# Altium PCB Power_Meter.PcbDoc
Units mm, origin at the board's own origin, x right, y up, seen from the top; angles counter-clockwise.
Board outline 68.58 x 47.6 mm, 2 copper layers (Top Layer, Bottom Layer); 15 components, 14 nets, 85 pads, 16 vias.
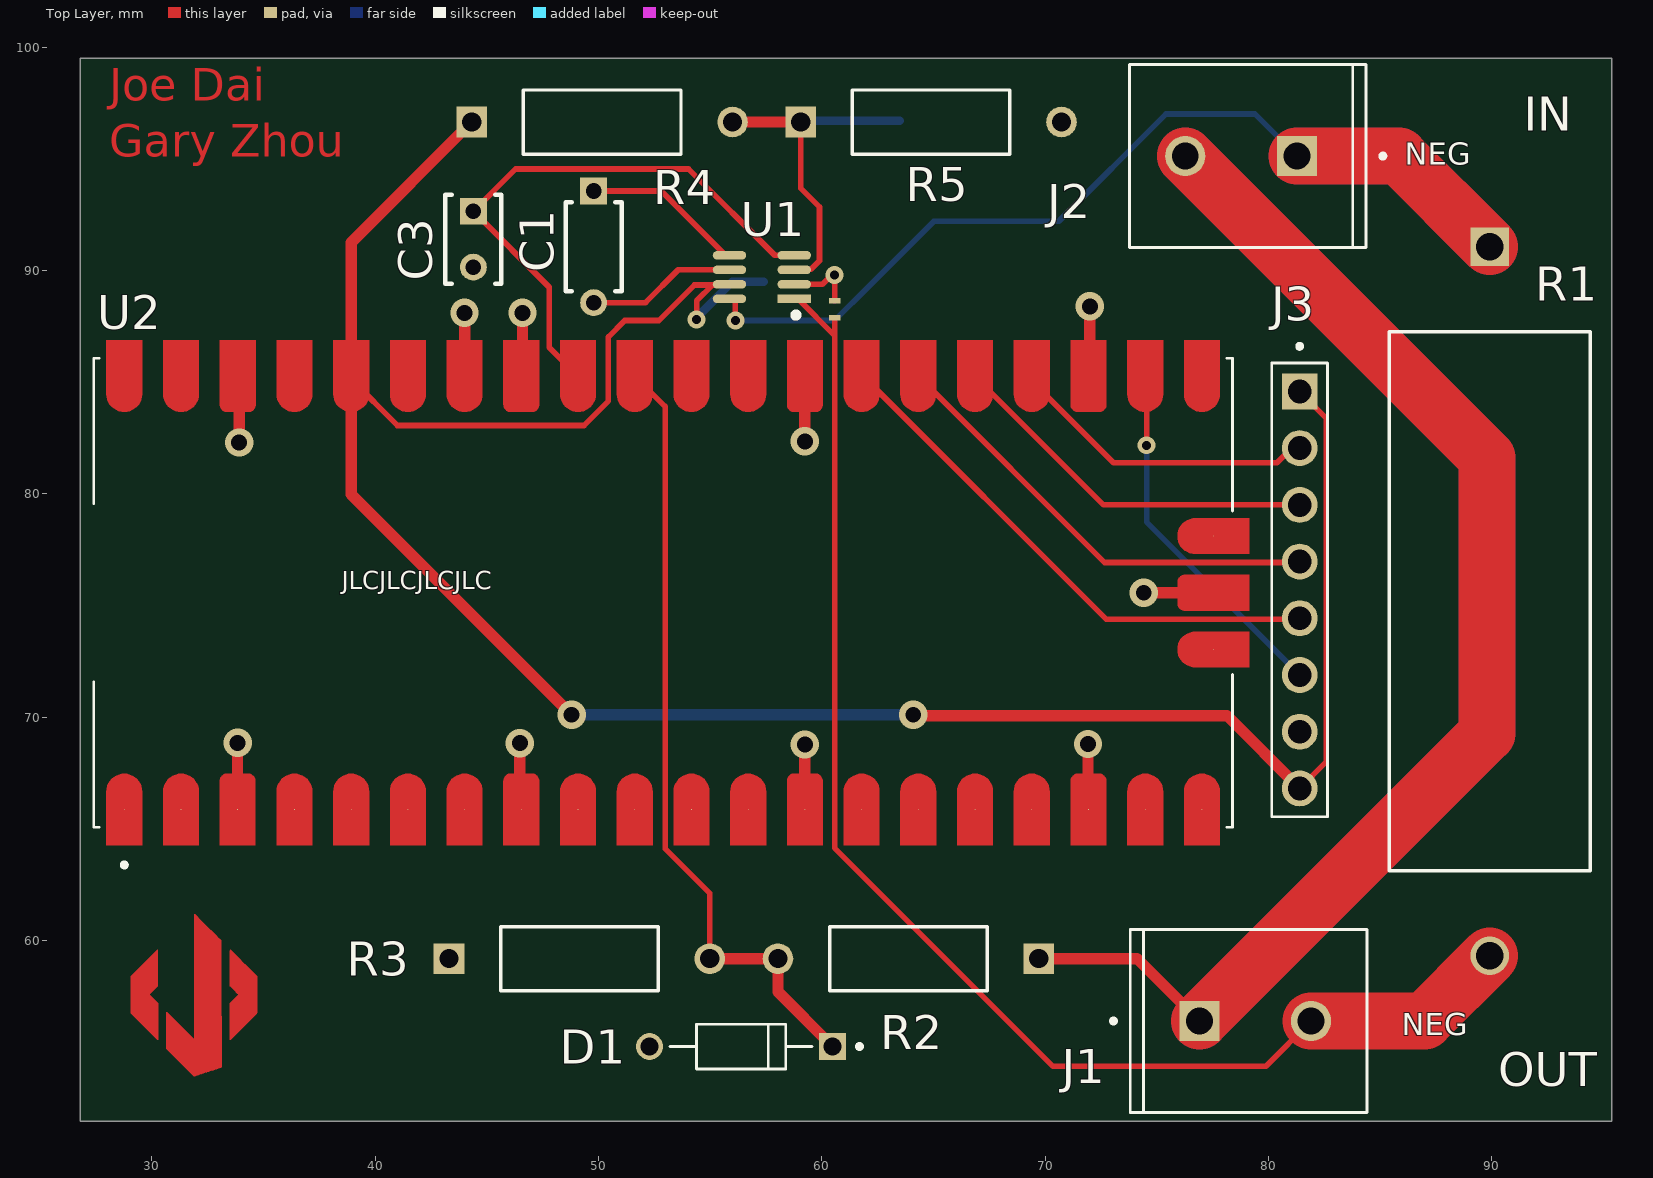
[diagram p0: Top Layer view]
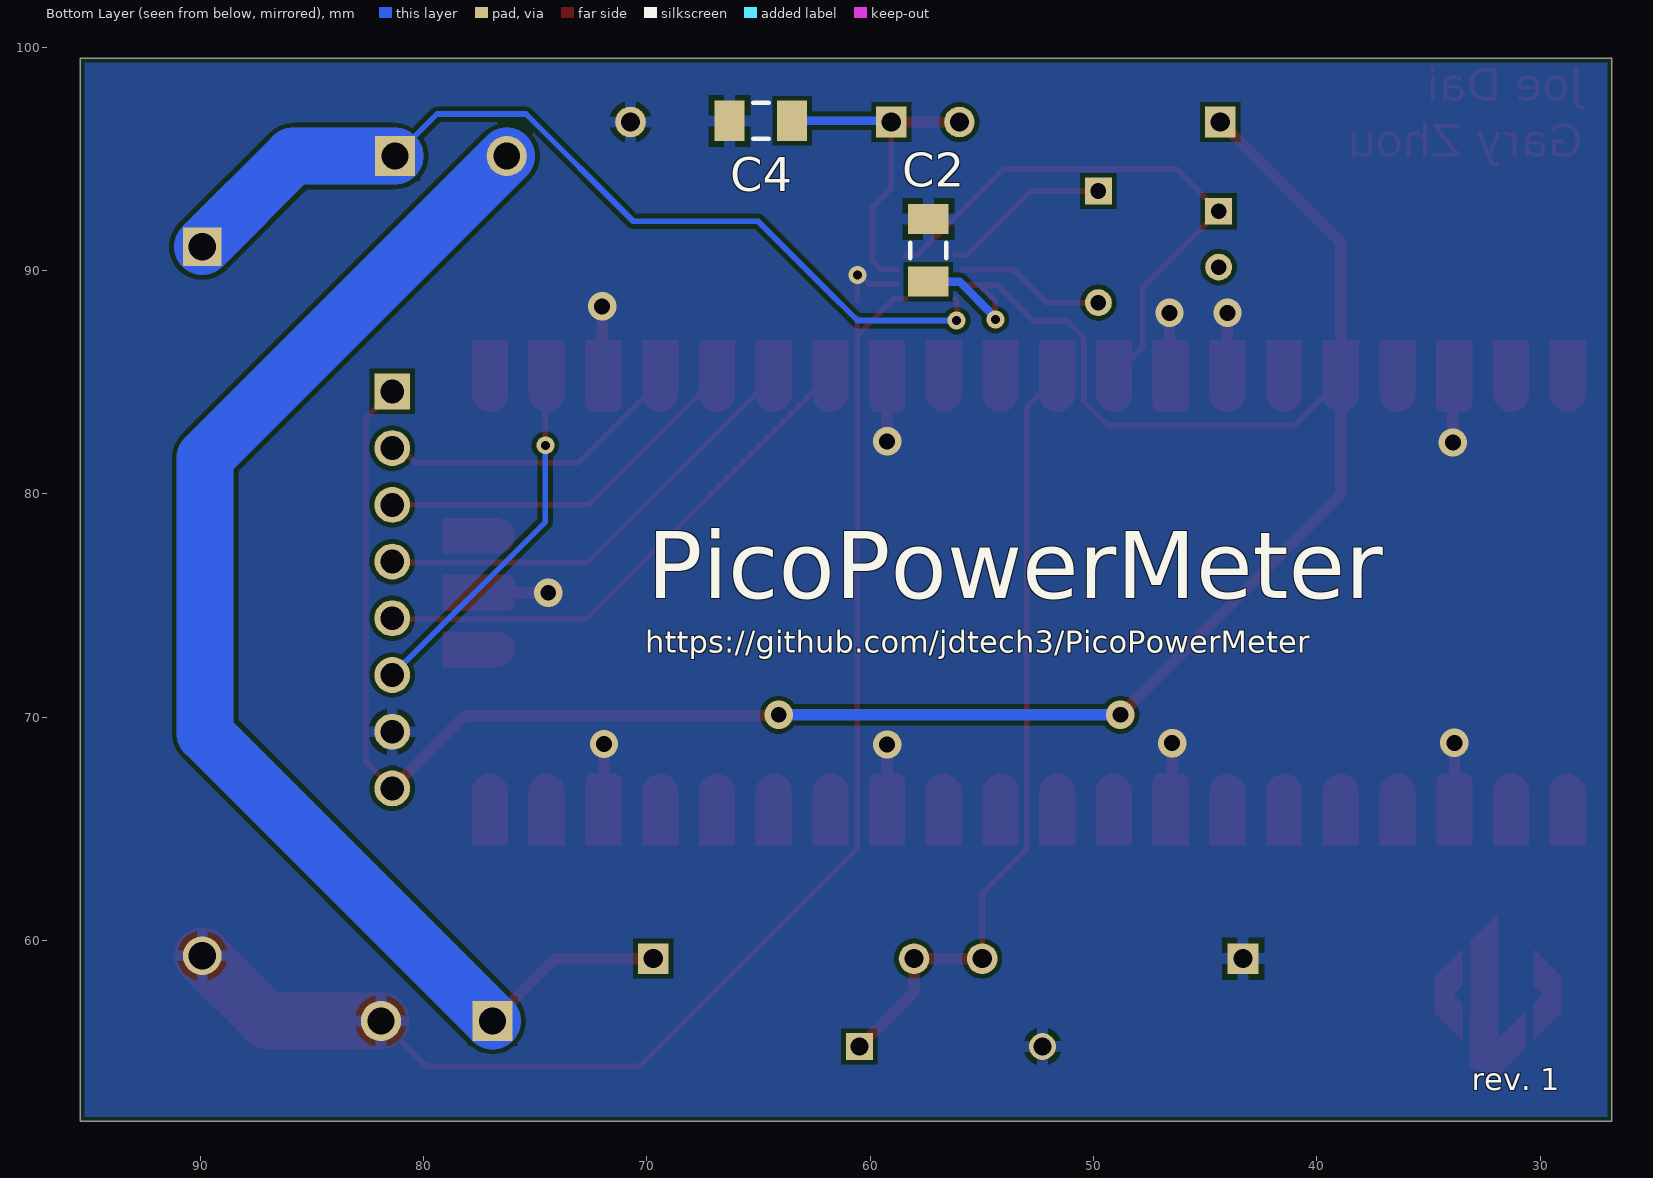
[diagram p1: Bottom Layer view, seen from below]
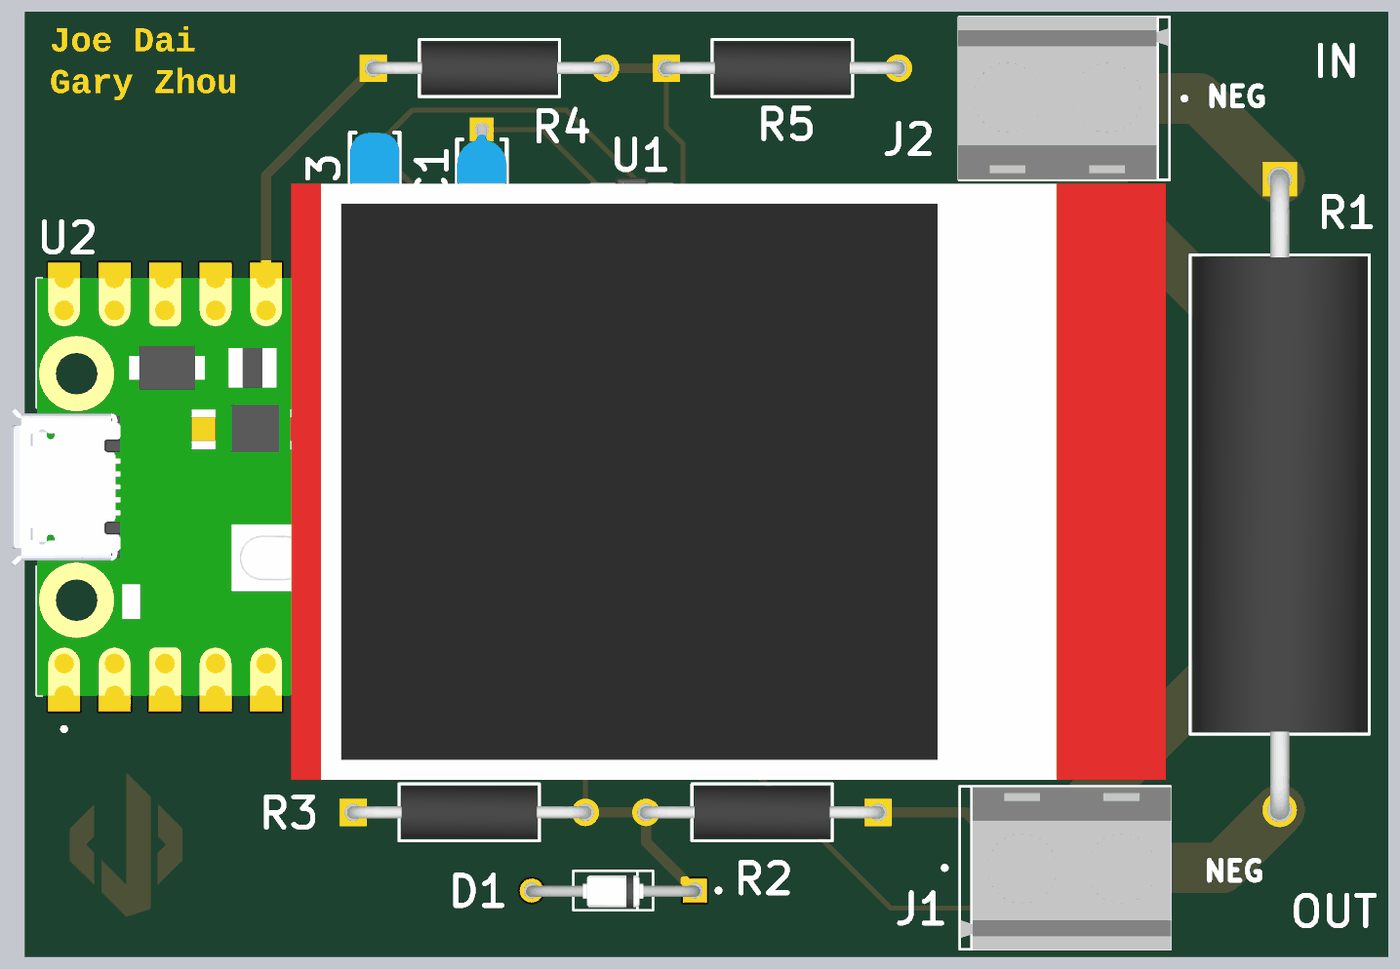
[diagram p2: 3D render of the assembled board from above, using the file's embedded part models]

## Layer stack, top to bottom
Top Solder: solder mask 0.0102, Solder Resist, Dk 3.5
Top Layer: signal copper 0.0356
Dielectric 1: dielectric 0.32, FR-4, Dk 4.8
Bottom Layer: signal copper 0.0356
Bottom Solder: solder mask 0.0102, Solder Resist, Dk 3.5

## Board outline
95.377,99.5 95.377,51.9 26.797,51.9 26.797,99.5

## Design rules (kind name [scope] priority, off if disabled: settings)
BoardOutlineClearance [All] p1: gap=0.2 ignorepadtopadclearanceinfootprint=FALSE except(0.4: Arc-SplitBarrior Arc-SplitContinuation Track-SplitBarrior Track-SplitContinuation SMDPad-SplitBarrior SMDPad-SplitContinuation THPad-SplitBarrior THPad-SplitContinuation Via-SplitBarrior Via-SplitContinuation Fill-SplitBarrior Fill-SplitContinuation Poly-SplitBarrior Poly-SplitContinuation Region-SplitBarrior Region-SplitContinuation Text-SplitBarrior Text-SplitContinuation)
Clearance "Clearance Bottom Layer" [OnLayer('Bottom Layer')] p1: gap=0.203 ignorepadtopadclearanceinfootprint=TRUE except(0.254: Arc-Text Track-Text SMDPad-Text THPad-Text Via-Text Fill-Text Poly-Text Region-Text Text-Text)
Clearance "Clearance Top Layer" [OnLayer('Top Layer')] p2: gap=0.203 ignorepadtopadclearanceinfootprint=TRUE except(0.254: Arc-Text Track-Text SMDPad-Text THPad-Text Via-Text Fill-Text Poly-Text Region-Text Text-Text)
Clearance [All] p3: gap=0.2 ignorepadtopadclearanceinfootprint=FALSE except(0.089: Arc-Arc Arc-Track Arc-SMDPad Track-Track Track-SMDPad SMDPad-SMDPad; 0.127: Arc-Via Track-Via SMDPad-Via THPad-Via Via-Via; 0.254: Arc-Text Track-Text SMDPad-Text THPad-Text Via-Text Fill-Text Poly-Text Region-Text Text-Text)
HoleSize [All] p1: absolutevalues=TRUE maxlimit=6.3 minlimit=0.2 maxpercent=80.000 minpercent=20.000
MinimumAnnularRing [All] p1: minimumring=0.076
MinimumSolderMaskSliver [All] p1: minsoldermaskwidth=0.1
PolygonConnect PolygonConnect_1 [All] p1: thpad.connectstyle=Relief thpad.reliefconductorwidth=0.508 thpad.reliefentries=4 thpad.polygonreliefangle="90 Angle" thpad.airgapwidth=0.254 smdpad.connectstyle=Relief smdpad.reliefconductorwidth=0.508 smdpad.reliefentries=4 smdpad.polygonreliefangle="90 Angle" smdpad.airgapwidth=0.254 via.connectstyle=Direct via.reliefconductorwidth=0.508 via.reliefentries=4 via.polygonreliefangle="90 Angle" via.airgapwidth=0.254
RoutingCorners [All] p1: cornerstyle=Round minsetback=2.54 maxsetback=2.54
RoutingVias [All] p1: holewidth=0.5 width=1 viastyle="Through Hole" minholewidth=0.2 minwidth=0.45 maxholewidth=1 maxwidth=2
SilkToSilkClearance [All] p1: silktosilkclearance=0.1
SilkToSolderMaskClearance [IsPad] p1: minsilkscreentomaskgap=0.1 clearancetoexposedcopper=TRUE
SolderMaskExpansion [All] p1: expansion=0.102 istentingtop=FALSE
Width [All] p1: maxlimit=2.54 minlimit=0.089 preferedwidth=0.381
25 further rules are at their usual default settings.

## Components (designator, comment, footprint, x,y, rotation, side; value= is the part's Value field where it differs from the comment)
C1 "RDE5C1H152J0M1H03A" FP-RDE0M1-MFG 49.784,91.059 r270 top
C2 "GRM319R71H104KA01D" CAPC3216X95X55NL15T25 57.4,90.9 r270 bottom
C3 "RCER72A473K1DBH03A" FP-RCE1A2-MFG 44.4,91.4 r270 top
C4 "GRM319R71H104KA01D" CAPC3216X95X55NL15T25 64.9,96.7 r0 bottom
D1 "NZX3V3A" DIOAD820W60L400D200 56.388,55.245 r180 top
J1 "282836-2" TE_282836-2 79.415,56.388 r0 top
J2 "282836-2" TE_282836-2 78.78,95.123 r180 top
J3 "TFT LCD" AMPHENOL_G800LE300018YEU 81.407,75.692 r270 top
R1 "MR5FT20L0" STA_MR5_STP 89.916,91.059 r270 top
R2 "MFP-25BRD52-100K" YAG_MF25_YAG 69.723,59.182 r180 top
R3 "MFP-25BRD52-15K" YAG_MF25_YAG 43.307,59.182 r0 top
R4 "MFP-25BRD52-100K" YAG_MF25_YAG 44.323,96.647 r0 top
R5 "MFP-25BRD52-33K" YAG_MF25_YAG 59.055,96.647 r0 top
U1 "AD8293G80ARJZ-R7" FP-RJ-8-IPC_B 57.32,89.703 r180 top
U2 "SC0915" MODULE_SC0915 52.897,75.565 r90 top

## Footprints (in the part's own frame and the unit in brackets; to place one, negate y for a bottom-side part, rotate by r counter-clockwise, add the part's x,y. Pads: shape width x height; smd on the part's side, far side on the other; paste and mask are expansions set on the pad)
AMPHENOL_G800LE300018YEU [mm]
  rect 1.605x1.605 hole 1.07: 1(-8.89,0)
  round 1.605 hole 1.07: 2(-6.35,0) 3(-3.81,0) 4(-1.27,0) 5(1.27,0) 6(3.81,0) 7(6.35,0) 8(8.89,0)
  silkscreen extent -11.01,-1.25 10.16,1.25, body extent -15.13,-41.21 14.87,2.79, height 11.62
CAPC3216X95X55NL15T25 [mm] "Chip Capacitor, 2-Leads, Body 3.35x1.75mm, IPC Medium Density"
  rect 1.35x1.8 smd: 1(-1.4,0) 2(1.4,0)
  silkscreen extent -0.35,-0.8 0.35,0.8, body extent -1.68,-0.87 1.68,0.87, height 0.95
DIOAD820W60L400D200 [mm]
  round 1.2 hole 0.8: 1(4.1,0)
  rect 1.2x1.2 hole 0.8: 2(-4.1,0)
  silkscreen extent -5.4,-1 3.18,1, body extent -4.37,-0.76 4.37,0.83, height 1.6
FP-RCE1A2-MFG [mm]
  rect 1.2x1.2 hole 0.7 paste-1000 mask+0: 1(-1.25,0)
  round 1.2 hole 0.7 paste-1000 mask+0: 2(1.25,0)
  silkscreen extent -2,-1.25 2,1.25, body extent -2.1,-1.35 2.1,1.35, height 0.25
FP-RDE0M1-MFG [mm]
  rect 1.2x1.2 hole 0.7 paste-1000 mask+0: 1(-2.5,0)
  round 1.2 hole 0.7 paste-1000 mask+0: 2(2.5,0)
  silkscreen extent -2,-1.25 2,1.25, body extent -3.2,-1.35 3.2,1.35, height 0.25
FP-RJ-8-IPC_B [mm]
  rect 1.5x0.39 smd paste+0 mask+0: 1(-1.45,0.975)
  rrect100% 1.5x0.39 smd paste+0 mask+0: 2(-1.45,0.325) 3(-1.45,-0.325) 4(-1.45,-0.975) 5(1.451,-0.975) 6(1.451,-0.325) 7(1.451,0.325) 8(1.451,0.975)
  silkscreen extent -1.65,1.58 -1.4,1.82, body extent -2.1,-1.7 2.1,1.7, height 0.25
MODULE_SC0915 [mil]
  round 1 smd paste-39.37 mask+3.94: 1(-381.89,950) 2(-381.89,850) 3(-381.89,750.38) 4(-381.89,650) 5(-381.89,550) 6(-381.89,450) 7(-381.89,350) 8(-381.89,250) 9(-381.89,150) 10(-381.89,50) 11(-381.89,-50) 12(-381.89,-150) 13(-381.89,-250) 14(-381.89,-350) 15(-381.89,-450) 16(-381.89,-550) 17(-381.89,-650) 18(-381.89,-750) 19(-381.89,-850) 20(-381.89,-950) 21(381.89,-950) 22(381.89,-850) 23(381.89,-750) 24(381.89,-650) 25(381.89,-550) 26(381.89,-450) 27(381.89,-350) 28(381.89,-250) 29(381.89,-150) 30(381.89,-50) 31(381.89,50) 32(381.89,150) 33(381.89,250) 34(381.89,350) 35(381.89,450) 36(381.89,550) 37(381.89,650) 38(381.89,750) 39(381.89,850) 40(381.89,950) D1(-100,-970) D2(0,-970) D3(100,-970)
  Top Layer region: 68.5,-1032.99 131.5,-1032.99 131.5,-938.5 129.1,-926.45 122.27,-916.23 112.05,-909.41 100,-907.01 100,-907.01 87.95,-909.41 77.73,-916.23 70.9,-926.45 68.5,-938.5 68.5,-938.5
  Top Layer region: -31.5,-1032.99 31.5,-1032.99 31.5,-919.61 30.54,-914.79 27.81,-910.7 23.72,-907.97 18.9,-907.01 18.9,-907.01 -18.9,-907.01 -23.72,-907.97 -27.81,-910.7 -30.54,-914.79 -31.5,-919.61 -31.5,-919.61
  Top Layer region: -131.5,-1032.99 -68.5,-1032.99 -68.5,-938.5 -70.9,-926.45 -77.73,-916.23 -87.95,-909.41 -100,-907.01 -100,-907.01 -112.05,-909.41 -122.27,-916.23 -129.1,-926.45 -131.5,-938.5 -131.5,-938.5
  Top Layer region: -444.88,918.5 -350.39,918.5 -338.34,920.9 -328.12,927.73 -321.3,937.95 -318.9,950 -318.9,950 -321.3,962.05 -328.12,972.27 -338.34,979.1 -350.39,981.5 -350.39,981.5 -444.88,981.5
  Top Layer region: 318.9,-768.9 319.86,-773.72 322.59,-777.81 326.67,-780.54 331.5,-781.5 331.5,-781.5 444.88,-781.5 444.88,-718.5 331.5,-718.5 326.67,-719.46 322.59,-722.19 319.86,-726.28 318.9,-731.1 318.9,-731.1
  Top Layer region: 318.9,-268.9 319.86,-273.72 322.59,-277.81 326.67,-280.54 331.5,-281.5 331.5,-281.5 444.88,-281.5 444.88,-218.5 331.5,-218.5 326.67,-219.46 322.59,-222.19 319.86,-226.28 318.9,-231.1 318.9,-231.1
  Top Layer region: 318.9,231.1 319.86,226.28 322.59,222.19 326.67,219.46 331.5,218.5 331.5,218.5 444.88,218.5 444.88,281.5 331.5,281.5 326.67,280.54 322.59,277.81 319.86,273.72 318.9,268.9 318.9,268.9
  Top Layer region: 318.9,-950 321.3,-962.05 328.12,-972.27 338.34,-979.1 350.39,-981.5 350.39,-981.5 444.88,-981.5 444.88,-918.5 350.39,-918.5 338.34,-920.9 328.12,-927.73 321.3,-937.95 318.9,-950
  Top Layer region: 318.9,-850 321.3,-862.05 328.12,-872.27 338.34,-879.1 350.39,-881.5 350.39,-881.5 444.88,-881.5 444.88,-818.5 350.39,-818.5 338.34,-820.9 328.12,-827.73 321.3,-837.95 318.9,-850
  Top Layer region: 318.9,-650 321.3,-662.05 328.12,-672.27 338.34,-679.1 350.39,-681.5 350.39,-681.5 444.88,-681.5 444.88,-618.5 350.39,-618.5 338.34,-620.9 328.12,-627.73 321.3,-637.95 318.9,-650
  Top Layer region: 318.9,-550 321.3,-562.05 328.12,-572.27 338.34,-579.1 350.39,-581.5 350.39,-581.5 444.88,-581.5 444.88,-518.5 350.39,-518.5 338.34,-520.9 328.12,-527.73 321.3,-537.95 318.9,-550
  Top Layer region: 318.9,-450 321.3,-462.05 328.12,-472.27 338.34,-479.1 350.39,-481.5 350.39,-481.5 444.88,-481.5 444.88,-418.5 350.39,-418.5 338.34,-420.9 328.12,-427.73 321.3,-437.95 318.9,-450
  Top Layer region: 318.9,-350 321.3,-362.05 328.12,-372.27 338.34,-379.1 350.39,-381.5 350.39,-381.5 444.88,-381.5 444.88,-318.5 350.39,-318.5 338.34,-320.9 328.12,-327.73 321.3,-337.95 318.9,-350
  Top Layer region: 318.9,-150 321.3,-162.05 328.12,-172.27 338.34,-179.1 350.39,-181.5 350.39,-181.5 444.88,-181.5 444.88,-118.5 350.39,-118.5 338.34,-120.9 328.12,-127.73 321.3,-137.95 318.9,-150
  Top Layer region: 318.9,-50 321.3,-62.05 328.12,-72.27 338.34,-79.1 350.39,-81.5 350.39,-81.5 444.88,-81.5 444.88,-18.5 350.39,-18.5 338.34,-20.9 328.12,-27.73 321.3,-37.95 318.9,-50
  Top Layer region: 318.9,50 321.3,37.95 328.12,27.73 338.34,20.9 350.39,18.5 350.39,18.5 444.88,18.5 444.88,81.5 350.39,81.5 338.34,79.1 328.12,72.27 321.3,62.05 318.9,50
  Top Layer region: 318.9,150 321.3,137.95 328.12,127.73 338.34,120.9 350.39,118.5 350.39,118.5 444.88,118.5 444.88,181.5 350.39,181.5 338.34,179.1 328.12,172.27 321.3,162.05 318.9,150
  Top Layer region: 350.39,318.5 338.34,320.9 328.12,327.73 321.3,337.95 318.9,350 318.9,350 321.3,362.05 328.12,372.27 338.34,379.1 350.39,381.5 350.39,381.5 444.88,381.5 444.88,318.5
  Top Layer region: 350.39,418.5 338.34,420.9 328.12,427.73 321.3,437.95 318.9,450 318.9,450 321.3,462.05 328.12,472.27 338.34,479.1 350.39,481.5 350.39,481.5 444.88,481.5 444.88,418.5
  Top Layer region: 350.39,518.5 338.34,520.9 328.12,527.73 321.3,537.95 318.9,550 318.9,550 321.3,562.05 328.12,572.27 338.34,579.1 350.39,581.5 350.39,581.5 444.88,581.5 444.88,518.5
  Top Layer region: 350.39,618.5 338.34,620.9 328.12,627.73 321.3,637.95 318.9,650 318.9,650 321.3,662.05 328.12,672.27 338.34,679.1 350.39,681.5 350.39,681.5 444.88,681.5 444.88,618.5
  Top Layer region: 350.39,818.5 338.34,820.9 328.12,827.73 321.3,837.95 318.9,850 318.9,850 321.3,862.05 328.12,872.27 338.34,879.1 350.39,881.5 350.39,881.5 444.88,881.5 444.88,818.5
  Top Layer region: -444.88,-781.5 -331.5,-781.5 -326.67,-780.54 -322.59,-777.81 -319.86,-773.72 -318.9,-768.9 -318.9,-768.9 -318.9,-731.1 -319.86,-726.28 -322.59,-722.19 -326.67,-719.46 -331.5,-718.5 -331.5,-718.5 -444.88,-718.5
  Top Layer region: -444.88,-281.5 -331.5,-281.5 -326.67,-280.54 -322.59,-277.81 -319.86,-273.72 -318.9,-268.9 -318.9,-268.9 -318.9,-231.1 -319.86,-226.28 -322.59,-222.19 -326.67,-219.46 -331.5,-218.5 -331.5,-218.5 -444.88,-218.5
  Top Layer region: -444.88,218.5 -331.5,218.5 -326.67,219.46 -322.59,222.19 -319.86,226.28 -318.9,231.1 -318.9,231.1 -318.9,268.9 -319.86,273.72 -322.59,277.81 -326.67,280.54 -331.5,281.5 -331.5,281.5 -444.88,281.5
  Top Layer region: -444.88,718.88 -331.5,718.88 -326.67,719.84 -322.59,722.57 -319.86,726.66 -318.9,731.48 -318.9,731.48 -318.9,769.28 -319.86,774.1 -322.59,778.18 -326.67,780.91 -331.5,781.87 -331.5,781.87 -444.88,781.87
  Top Layer region: -444.88,-981.5 -350.39,-981.5 -338.34,-979.1 -328.12,-972.27 -321.3,-962.05 -318.9,-950 -318.9,-950 -321.3,-937.95 -328.12,-927.73 -338.34,-920.9 -350.39,-918.5 -350.39,-918.5 -444.88,-918.5
  Top Layer region: -444.88,-881.5 -350.39,-881.5 -338.34,-879.1 -328.12,-872.27 -321.3,-862.05 -318.9,-850 -318.9,-850 -321.3,-837.95 -328.12,-827.73 -338.34,-820.9 -350.39,-818.5 -350.39,-818.5 -444.88,-818.5
  Top Layer region: -444.88,-681.5 -350.39,-681.5 -338.34,-679.1 -328.12,-672.27 -321.3,-662.05 -318.9,-650 -318.9,-650 -321.3,-637.95 -328.12,-627.73 -338.34,-620.9 -350.39,-618.5 -350.39,-618.5 -444.88,-618.5
  Top Layer region: -444.88,-581.5 -350.39,-581.5 -338.34,-579.1 -328.12,-572.27 -321.3,-562.05 -318.9,-550 -318.9,-550 -321.3,-537.95 -328.12,-527.73 -338.34,-520.9 -350.39,-518.5 -350.39,-518.5 -444.88,-518.5
  Top Layer region: -444.88,-481.5 -350.39,-481.5 -338.34,-479.1 -328.12,-472.27 -321.3,-462.05 -318.9,-450 -318.9,-450 -321.3,-437.95 -328.12,-427.73 -338.34,-420.9 -350.39,-418.5 -350.39,-418.5 -444.88,-418.5
  Top Layer region: -444.88,-381.5 -350.39,-381.5 -338.34,-379.1 -328.12,-372.27 -321.3,-362.05 -318.9,-350 -318.9,-350 -321.3,-337.95 -328.12,-327.73 -338.34,-320.9 -350.39,-318.5 -350.39,-318.5 -444.88,-318.5
  Top Layer region: -444.88,-181.5 -350.39,-181.5 -338.34,-179.1 -328.12,-172.27 -321.3,-162.05 -318.9,-150 -318.9,-150 -321.3,-137.95 -328.12,-127.73 -338.34,-120.9 -350.39,-118.5 -350.39,-118.5 -444.88,-118.5
  Top Layer region: -444.88,-81.5 -350.39,-81.5 -338.34,-79.1 -328.12,-72.27 -321.3,-62.05 -318.9,-50 -318.9,-50 -321.3,-37.95 -328.12,-27.73 -338.34,-20.9 -350.39,-18.5 -350.39,-18.5 -444.88,-18.5
  Top Layer region: -444.88,18.5 -350.39,18.5 -338.34,20.9 -328.12,27.73 -321.3,37.95 -318.9,50 -318.9,50 -321.3,62.05 -328.12,72.27 -338.34,79.1 -350.39,81.5 -350.39,81.5 -444.88,81.5
  Top Layer region: -444.88,118.5 -350.39,118.5 -338.34,120.9 -328.12,127.73 -321.3,137.95 -318.9,150 -318.9,150 -321.3,162.05 -328.12,172.27 -338.34,179.1 -350.39,181.5 -350.39,181.5 -444.88,181.5
  Top Layer region: -444.88,318.5 -350.39,318.5 -338.34,320.9 -328.12,327.73 -321.3,337.95 -318.9,350 -318.9,350 -321.3,362.05 -328.12,372.27 -338.34,379.1 -350.39,381.5 -350.39,381.5 -444.88,381.5
  Top Layer region: -444.88,418.5 -350.39,418.5 -338.34,420.9 -328.12,427.73 -321.3,437.95 -318.9,450 -318.9,450 -321.3,462.05 -328.12,472.27 -338.34,479.1 -350.39,481.5 -350.39,481.5 -444.88,481.5
  Top Layer region: -444.88,518.5 -350.39,518.5 -338.34,520.9 -328.12,527.73 -321.3,537.95 -318.9,550 -318.9,550 -321.3,562.05 -328.12,572.27 -338.34,579.1 -350.39,581.5 -350.39,581.5 -444.88,581.5
  Top Layer region: -444.88,618.5 -350.39,618.5 -338.34,620.9 -328.12,627.73 -321.3,637.95 -318.9,650 -318.9,650 -321.3,662.05 -328.12,672.27 -338.34,679.1 -350.39,681.5 -350.39,681.5 -444.88,681.5
  Top Layer region: -444.88,818.5 -350.39,818.5 -338.34,820.9 -328.12,827.73 -321.3,837.95 -318.9,850 -318.9,850 -321.3,862.05 -328.12,872.27 -338.34,879.1 -350.39,881.5 -350.39,881.5 -444.88,881.5
  Top Layer region: 331.5,718.5 326.67,719.46 322.59,722.19 319.86,726.28 318.9,731.1 318.9,731.1 318.9,768.9 319.86,773.72 322.59,777.81 326.67,780.54 331.5,781.5 331.5,781.5 444.88,781.5 444.88,718.5
  Top Layer region: 350.39,918.5 338.34,920.9 328.12,927.73 321.3,937.95 318.9,950 318.9,950 321.3,962.05 328.12,972.27 338.34,979.1 350.39,981.5 350.39,981.5 444.88,981.5 444.88,918.5
  silkscreen extent -484,-1004 413,1004, body extent -413,-1004 413,1055, height 147
STA_MR5_STP [mil]
  rect 68x68 hole 48 mask+0: 1(0,0)
  round 68 hole 48 mask+0: 2(1250,0)
  silkscreen extent 150,-177 1100,178, body extent -19,-172 1269,172, height 344
TE_282836-2 [mm]
  rect 1.8x1.8 hole 1.2: 1(-2.5,0)
  round 1.8 hole 1.2: 2(2.5,0)
  silkscreen extent -6.45,-4.1 5,4.1, body extent -5.55,-4.14 5.05,4.06, height 11.35
YAG_MF25_YAG [mil]
  rect 54x54 hole 34 mask+0: 1(0,0)
  round 54 hole 34 mask+0: 2(460,0)
  silkscreen extent 91,-56 369,57, body extent -12,-51 472,51, height 103

## Part data
C1: library part CMP-06035-053070-1, "Ceramic Capacitor 1.5nF ±5% 50V C0G Radial", Capacitance=1.5nF, Case/Package=Radial, Dielectric=C0G, Max Operating Temperature=125°C, Min Operating Temperature=-55°C, Package Quantity=2000, Resistor Type=Ceramic, Tolerance=5%, Voltage Rating=50V, Height=3.5mm, Height - Seated (Max)=0.236inch, Lead Diameter=0.5mm, Lead Pitch=0.197inch, Lead/Base Style="Formed Leads", Length=0.157inch, Mount="Through Hole", Packaging="Tape and Reel", Termination=Radial, Voltage Rating (DC)=50V, Width=3.5mm
C2 C4: library part CMP-1662-00007-4, "Chip Capacitor, 0.1 uF, +/- 10%, 50 V, -55 to 125 degC, 1206 (3216 Metric), RoHS, Tape and Reel", Capacitance="0.1 uF", Manufacturer=Murata, Max Operating Temperature="125 degC", Min Operating Temperature="-55 degC", Package Quantity=4000, Voltage Rating="50 V", ComponentLink1Description="Manufacturer URL", ComponentLink1URL=http://www.murata.com/, ComponentLink2Description=Datasheet, ComponentLink2URL=http://search.murata.co.jp/Ceramy/image/img/A01X/G101/ENG/GRM319R71H104KA01-01.pdf, DatasheetVersion=03/2016, Height="0.85 mm", Lead Pitch="4 mm", Length="3.2 mm", Mount="Surface Mount", Mounting Technology="Surface Mount", PackageDescription="2-Pin Surface Mount Device, Body 3.2 x 1.6 mm", PackageReference="1206 (3216 Metric)", Packaging="Tape and Reel", Pins=2, REACH SVHC="No SVHC", RoHSCompliant=true
C3: library part CMP-06035-043805-1, "Cap Ceramic 47nF 100V X7R ±10% Radial 2.5mm +125°C Automotive Ammo Pack", Capacitance=47nF, Case/Package=Radial, Dielectric=X7R, Max Operating Temperature=125°C, Min Operating Temperature=-55°C, Package Quantity=2000, Ratings=AEC-Q200, Resistor Type=Ceramic, Tolerance=10%, Voltage Rating=100V, Height=3.5mm, Height - Seated (Max)=0.138inch, Lead Diameter=0.5mm, Lead Pitch=0.098inch, Lead/Base Style=Straight, Length=0.157inch, Mount="Through Hole", Packaging="Tape and Reel", Termination=Radial, Voltage Rating (DC)=100V, Width=0.098inch
D1: library part "D Zener", "Zener Diode", LatestRevisionDate=17-Jul-2002, LatestRevisionNote="Re-released for DXP Platform.", PackageDescription="Diode, Thru-Hole; 2 Leads; 0.7 in Pin Spacing", PackageReference=DIODE-0.7, Published=8-Jun-2000, Publisher="Altium Limited"
J1 J2: "Connector, Terminal Block; Wire Receptacle; 2 Pos.; 16-30 AWG; 0.197 in. CL; Sid", Color=Green, Current=13.5A, Flammability Rating="UL94 V-0", Manufacturer="TE Connectivity", Max Supply Voltage (AC)=300V, Package=None, Package Quantity=300, Approvals=UL, Availability=Unavailable, Category="Terminal Blocks", Closed End="No (Without)", ComponentLink1Description=https://datasheet.ciiva.com/11757/0900766b8002dc8a-11757385.pdf?src-supplier=RSComponents, ComponentLink1URL=https://datasheet.ciiva.com/11757/0900766b8002dc8a-11757385.pdf?src-supplier=RSComponents, ComponentLink2Description=https://datasheet.ciiva.com/16393/282836-2-16393382.pdf?src-supplier=Future+Electronics, ComponentLink2URL=https://datasheet.ciiva.com/16393/282836-2-16393382.pdf?src-supplier=Future+Electronics, ComponentLink3Description=https://datasheet.ciiva.com/15169/getdatasheetpartid-155855-15169553.pdf?src-supplier=Verical, ComponentLink3URL=https://datasheet.ciiva.com/15169/getdatasheetpartid-155855-15169553.pdf?src-supplier=Verical, ComponentLink4Description=https://datasheet.ciiva.com/7628/1731782-7628513.pdf?src-supplier=Element14, ComponentLink4URL=https://datasheet.ciiva.com/7628/1731782-7628513.pdf?src-supplier=Element14, ComponentLink5Description=https://datasheet.ciiva.com/3141/eng-cs-1308389-eurostyle-terminal-blocks-0607-3141118.pdf?src-supplier=Avnet, ComponentLink5URL=https://datasheet.ciiva.com/3141/eng-cs-1308389-eurostyle-terminal-blocks-0607-3141118.pdf?src-supplier=Avnet, ComponentLink6Description=https://datasheet.ciiva.com/30261/eng-cs-1308389-eurostyle-terminal-blocks-0607-30261813.pdf?src-supplier=Onlinecomponents.com, ComponentLink6URL=https://datasheet.ciiva.com/30261/eng-cs-1308389-eurostyle-terminal-blocks-0607-30261813.pdf?src-supplier=Onlinecomponents.com, ComponentLink7Description=https://datasheet.ciiva.com/823/eng-cd-282836-h10-823437.pdf?src-supplier=Digi-Key, ComponentLink7URL=https://datasheet.ciiva.com/823/eng-cd-282836-h10-823437.pdf?src-supplier=Digi-Key, Connector Type=Receptacle, Contact Material=Brass, Contact Plating=Tin, Current Rating=13.5A, Depth=8.2mm, ELV=Compliant, Housing Color=Green, Housing Material=Polyamide, Insulation Material=Nylon, Interlock="Yes (With)", Lead Free="Lead Free", Length=10.6mm, Manufacturer Part Number=282836-2, Max Current Rating=13.5A, Max Voltage Rating (AC)=300V, MF="{'manufacturer': u'TE Connectivity'}", Mounting Technology="Through Hole", MP=282836-2, Number of Circuits=2, Number of Contacts=2, Number of Levels=1, Number of Poles=2, Number of Positions=2, Number of Positions Per Level=2, Number of Rows=1, Orientation=Straight, Packaging=Tray, Pitch=5mm, Plating=Brass, Price=None, Pricing 1="1=1.05000, 10=0.65800, 25=0.56320, 50=0.50620, 100=0.49560, 250=0.42180, 500=0.40070, 1000=0.35853, 5000=0.28049 (USD)", Radiation Hardening=No, RoHS=Yes, RoHS Compliant=Yes, Screw Flange="No (Without)", Screwless Terminal Block="No (Without)", Series=Buchanan, Side Stackable="Yes (With)", Stock 1=3928, Supplier 1=Digi-Key, Tail Length=3.5mm, Termination=Solder, Thread Size=M3, Voltage=300V, Voltage Rating=300V, Width=10mm, Wire Gauge (Max)=30AWG, Wire Gauge (Min)=30AWG, Wire/Cable Gauge=30AWG
J3: library part G800LE300018YEU, Package=None, Availability=Unavailable, MF="{'manufacturer': u'Amphenol ICC (Commercial Products)'}", MP=G800LE300018YEU, Price=None
R1: "No Description Available", Mfr_Name="Stackpole International", Copyright="Copyright (C) 2022 Ultra Librarian. All rights reserved.", Digi-Key_Part_Number_1=MR5FT20L0CT-ND, Digi-Key_Part_Number_2=MR5FT20L0TR-ND, Manufacturer_Part_Number=MR5FT20L0, RefDes=RefDes, Type=DEV
R2 R3 R4 R5: "No Description Available", Mfr_Name=Yageo, Copyright="Copyright (C) 2022 Ultra Librarian. All rights reserved.", RefDes=RefDes, Type=DEV
  R2 R4: Digi-Key_Part_Number_1=100KADCT-ND, Digi-Key_Part_Number_2=100KADTR-ND, Manufacturer_Part_Number=MFP-25BRD52-100K
  R3: Digi-Key_Part_Number_1=15KADCT-ND, Digi-Key_Part_Number_2=15KADTR-ND, Manufacturer_Part_Number=MFP-25BRD52-15K
  R5: Digi-Key_Part_Number_1=33KADCT-ND, Digi-Key_Part_Number_2=33KADTR-ND, Manufacturer_Part_Number=MFP-25BRD52-33K
U1: library part CMP-09116-000180-1, "IC INST AMP 1 CIRCUIT SOT23-8", Case/Package=SOT, Input Bias Current=2nA, Input Offset Voltage (Vos)=50uV, Input Resistance=10GR, Max Operating Temperature=85°C, Max Supply Voltage=5.5V, Min Operating Temperature=-40°C, Min Supply Voltage=1.8V, Operating Supply Current=1.3mA, Output Current per Channel=35mA, Package Quantity=1, Power Supply Rejection Ratio (PSRR)=94dB, -3db Bandwidth=500Hz, Amplifier Type="INSTRUMENTATION AMPLIFIER", Common Mode Rejection Ratio=140dB, Contact Plating=Gold, Gain Bandwidth Product=500Hz, Lead Free="Contains Lead", Mount="Surface Mount", Number of Amplifiers=1, Number of Channels=1, Number of Circuits=1, Number of Elements=1, Number of Pins=8, Packaging="Tape and Reel", Radiation Hardening=No, REACH SVHC="No SVHC", RoHS Compliant=Yes, Series=-
U2: "Raspberry Pi Pico Embedded Dev Module", Manufacturer="Raspberry Pi", Package=None, Availability=Unavailable, Category="Embedded Processors and Controllers", Manufacturer Part Number=SC0915, MF="{'manufacturer': u'Raspberry Pi'}", MP=SC0915, Price=None, Pricing 1="1=4.00000 (USD)", RoHS=No, Stock 1=26880, Supplier 1=Digi-Key

## Free pads (board coordinates)
  rect 0.508x0.254 smd: 2(60.579,87.884) 2(60.579,88.646)

## Via types
v1: diameter 1.27, hole 0.711, Top Layer to Bottom Layer, 12 vias
v2: diameter 0.8, hole 0.4, Top Layer to Bottom Layer, 4 vias

## Nets (pads, with @x,y where several pads share a name; then routed paths per layer and width w, separated by ;. In a path a pad name is that pad's centre, name@x,y a point inside that pad or via, vN(x,y) a via of type N, cw(c..) or ccw(c..) an arc to the next point about the centre after c; other vN are vias at no path point)
AMP_FILT: C1.2 U1.6 | length 6.7
  Top Layer w0.254: C1.2 52.105,88.559 53.574,90.028 U1.6
GND: C2.1 C4.2 D1.1 J1.2 J3.7 pad.2 R1.2 R3.1 R5.2 U1.1 U1.2 U2.3 U2.8 U2.13 U2.18 U2.23 U2.28 U2.33 U2.34 U2.38 U2.D2 | length 94.8
  Top Layer w0.254: U2.38@33.847,85.255 33.909,85.193 ; v1(44,88.1) v1@44.007,88.093 ; 46.482,65.94 U2.8@46.547,65.875 ; U1.1@58.42,88.728 58.945,88.728 60.579,87.094 ; U1.2 60.02,89.378 60.431,89.789 v2(60.579,89.789) pad.2@60.579,88.646 ; pad.2@60.579,87.884 60.579,87.094 ; U2.23@71.947,85.255 71.947,85.385 72.009,85.447 ; J1.2 79.883,54.356 70.357,54.356 60.579,64.134 60.579,87.094
  Top Layer w0.381: U2.33 46.6,85.318
  Top Layer w0.508: U2.3 33.837,68.836 v1(33.844,68.842) ; v1(33.909,82.296) 33.909,85.193 ; U2.34 v1@44.007,88.093 ; 46.482,65.94 v1(46.482,68.834) ; 46.6,85.318 v1(46.6,88.1) ; U2.13@59.247,65.875 v1(59.247,68.772) ; v1(59.247,82.347) U2.28@59.247,85.255 ; 71.925,65.887 v1(71.925,68.794) ; 72.009,85.447 v1(72.009,88.392) ; v1(74.422,75.565) 77.597,75.565
  Top Layer w2.54: J1.2 86.995,56.388 R1.2
LCD_LED: C2.2 J3.1 J3.8 R4.1 U1.7 U2.36 | length 113.3
  Top Layer w0.254: 38.927,85.125 40.994,83.058 49.35,83.058 50.446,84.154 50.446,87.023 51.18,87.757 52.705,87.757 54.298,89.35 55.104,89.35 ; v2(54.4,87.8) 54.4,88.647 55.104,89.35 ; U1.7@55.841,89.35 55.104,89.35 ; J3.8 82.591,67.986 82.591,83.398 J3.1
  Top Layer w0.381: 38.927,85.125 U2.36@38.927,85.255 ; v1(64.1,70.1) v1@64.136,70.064
  Top Layer w0.508: 38.927,85.125 38.927,79.973 v1(48.8,70.1) ; U2.36 38.927,91.251 R4.1 ; v1@64.136,70.064 78.145,70.064 J3.8
  Bottom Layer w0.381: v2(54.4,87.8) 54.4,87.9 56,89.5 C2.2
  Bottom Layer w0.508: v1(48.8,70.1) v1(64.1,70.1)
LCD_RESET: J3.5 U2.27 | length 24.1
  Top Layer w0.254: U2.27 61.857,85.265 72.738,74.384 81.369,74.384 J3.5
LCD_TFT_A0: J3.4 U2.26 | length 20.6
  Top Layer w0.254: U2.26 72.668,76.924 81.369,76.924 J3.4
LCD_TFT_CS: J3.6 U2.22 | length 16.2
  Top Layer w0.254: U2.22 74.549,85.203 v2(74.549,82.169)
  Bottom Layer w0.254: v2(74.549,82.169) 74.549,78.74 J3.6
LCD_TFT_SCK: J3.2 U2.24 | length 14
  Top Layer w0.254: U2.24 69.407,85.054 73.073,81.388 80.387,81.388 81.041,82.042 J3.2
LCD_TFT_SDA: J3.3 U2.25 | length 16.9
  Top Layer w0.254: U2.25@66.867,85.255 72.62,79.502 J3.3
NetC1_1: C1.1 U1.5 | length 7.6
  Top Layer w0.254: C1.1 52.813,93.559 55.694,90.678 U1.5@56.219,90.678
NetC4_1: C4.1 R4.2 R5.1 U1.3 | length 15.4
  Top Layer w0.254: U1.3 58.798,90.056 59.522,90.056 59.904,90.437 59.904,92.838 59.055,93.687 R5.1
  Top Layer w0.508: R4.2 R5.1
  Bottom Layer w0.381: R5.1 59.108,96.7 C4.1
NetJ2_1: J2.1 R1.1 U1.8 | length 51.4
  Top Layer w0.254: v2(56.134,87.757) 56.134,88.665 56.197,88.728 U1.8@56.219,88.728
  Top Layer w2.54: J2.1 85.852,95.123 R1.1
  Bottom Layer w0.254: v2(56.134,87.757) 60.579,87.757 62.103,89.281 65.024,92.202 70.612,92.202 75.414,97.004 79.399,97.004 J2.1
  Bottom Layer w2.54: J2.1 85.852,95.123 R1.1
V+: J1.1 J2.2 R2.1 | length 107.7
  Top Layer w0.508: R2.1 74.121,59.182 J1.1
  Top Layer w2.54: J2.2 89.789,81.614 89.789,69.262 J1.1
  Bottom Layer w2.54: J2.2 89.789,81.614 89.789,69.262 J1.1
V_DIV: D1.2 R2.2 R3.2 U2.31 | length 35.5
  Top Layer w0.254: U2.31 52.986,83.906 52.986,64.107 54.991,62.102 R3.2
  Top Layer w0.508: R3.2 R2.2 58.039,57.694 D1.2
VDROP_AMP: C3.1 U1.4 U2.32 | length 25.7
  Top Layer w0.254: U2.32 47.8,86.552 47.8,89.25 C3.1 46.29,94.54 54.033,94.54 57.895,90.678 U1.4@58.42,90.678
pads on no net: C3.2 U2.1 U2.2 U2.4 U2.5 U2.6 U2.7 U2.9 U2.10 U2.11 U2.12 U2.14 U2.15 U2.16 U2.17 U2.19 U2.20 U2.21 U2.29 U2.30 U2.35 U2.37 U2.39 U2.40 U2.D1 U2.D3

## Polygon pours and split planes (outlines as drawn)
GND on Bottom Layer "GND_L02_P000" (solid, pour order 0): 26.797,99.314 95.377,99.314 95.377,52.07 26.797,52.07

## Other copper
Top Layer:
  region: 861 vertices and 0 holes, not listed, extent 29.057,55.543 30.292,59.583
  region: 847 vertices and 0 holes, not listed, extent 33.481,55.543 34.716,59.583
  region: 1099 vertices and 0 holes, not listed, extent 30.64,53.923 33.125,61.166
  text "Joe Dai / Gary Zhou" at 28.1,94.6 h2.5

## Silkscreen, mask and mechanical layers (free items; w line width, h text height)
Top Overlay:
  text "IN" at 91.44,96.266 h1.52
  text "NEG" at 86.106,94.742 h1
  text "JLCJLCJLCJLC" at 38.504,75.715 h0.8
  text "NEG" at 85.979,55.753 h1
  text "OUT" at 90.297,53.467 h1.52
Bottom Overlay:
  text "PicoPowerMeter" at 69.977,75.311 h3
  text "https://github.com/jdtech3/PicoPowerMeter" at 70.078,72.876 h1
  text "rev. 1" at 33.074,53.286 h1
Top Solder:
  text "Joe Dai / Gary Zhou" at 28.1,94.6 h2.5